# Altium PCB GPS_LEA5S.v.0.1.PcbDoc
Units mil, origin at the board's own origin, x right, y up, seen from the top; angles counter-clockwise.
Board outline 6000 x 4000 mil, 2 copper layers (Top Layer, Bottom Layer), stack 11.068 mil thick; 56 components, 12 nets, 83 pads, 254 vias.
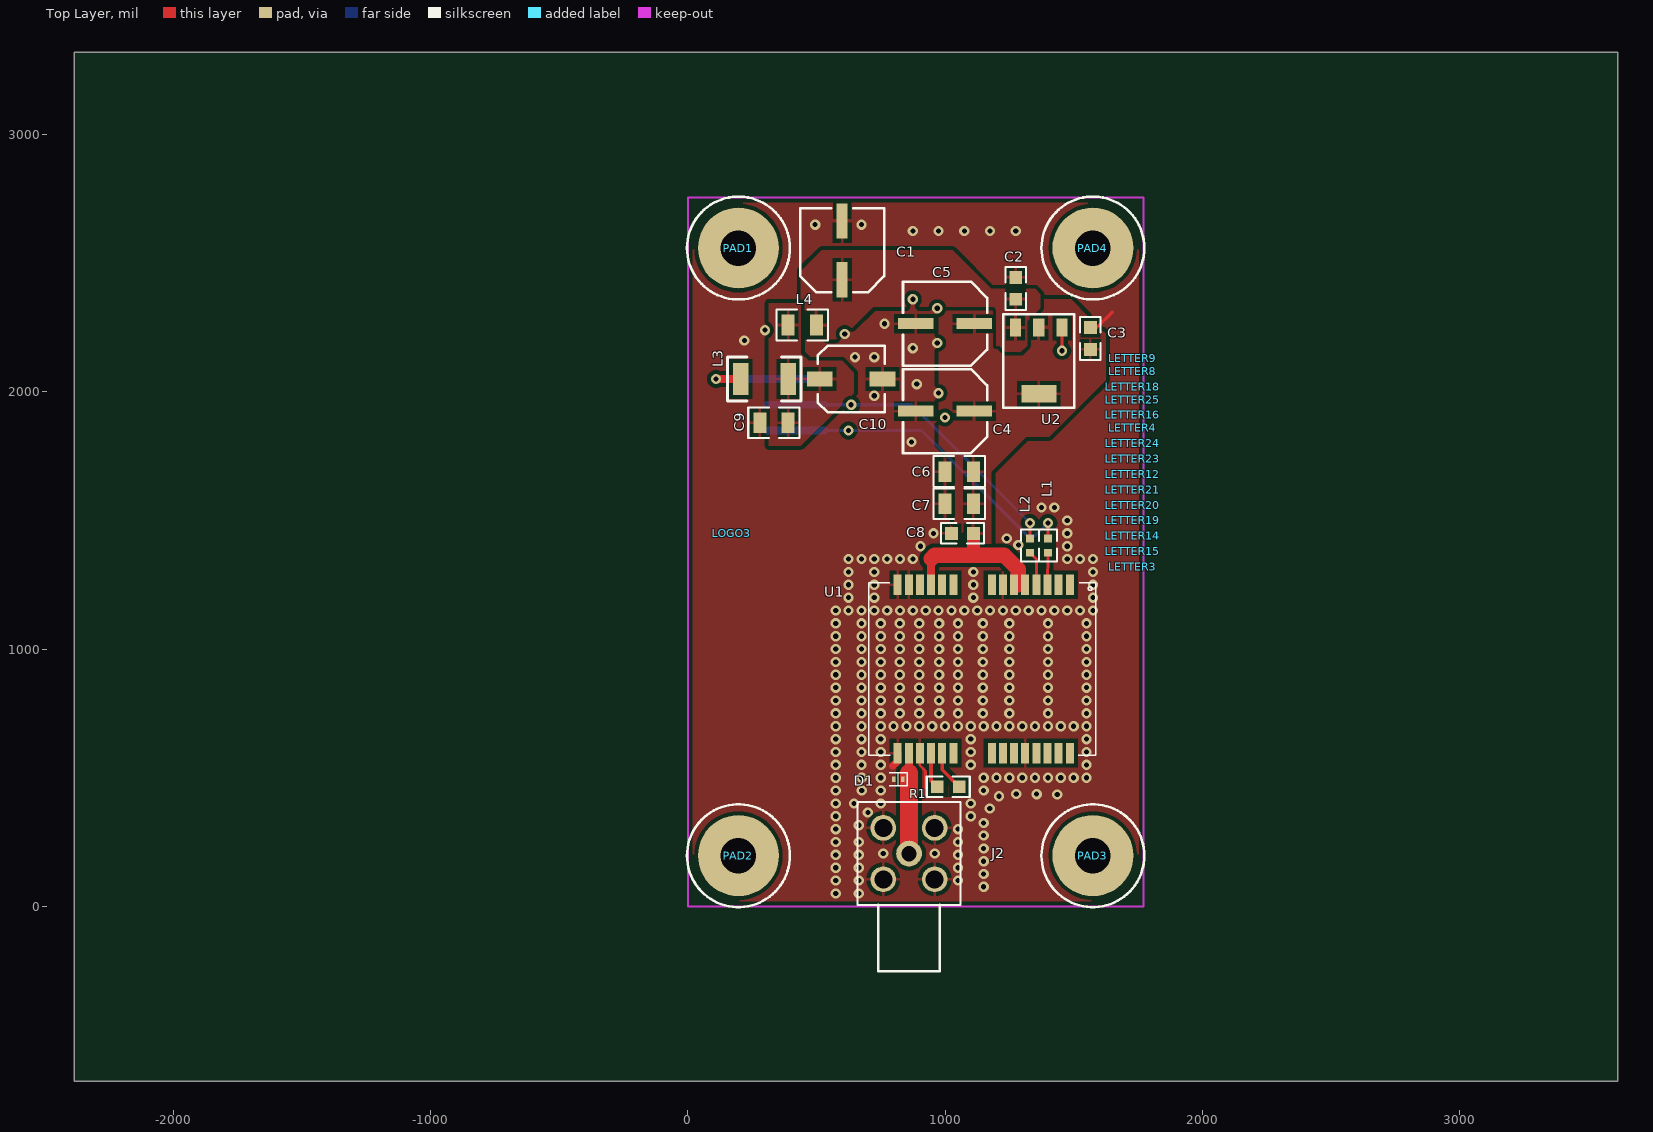
[diagram p0: Top Layer view]
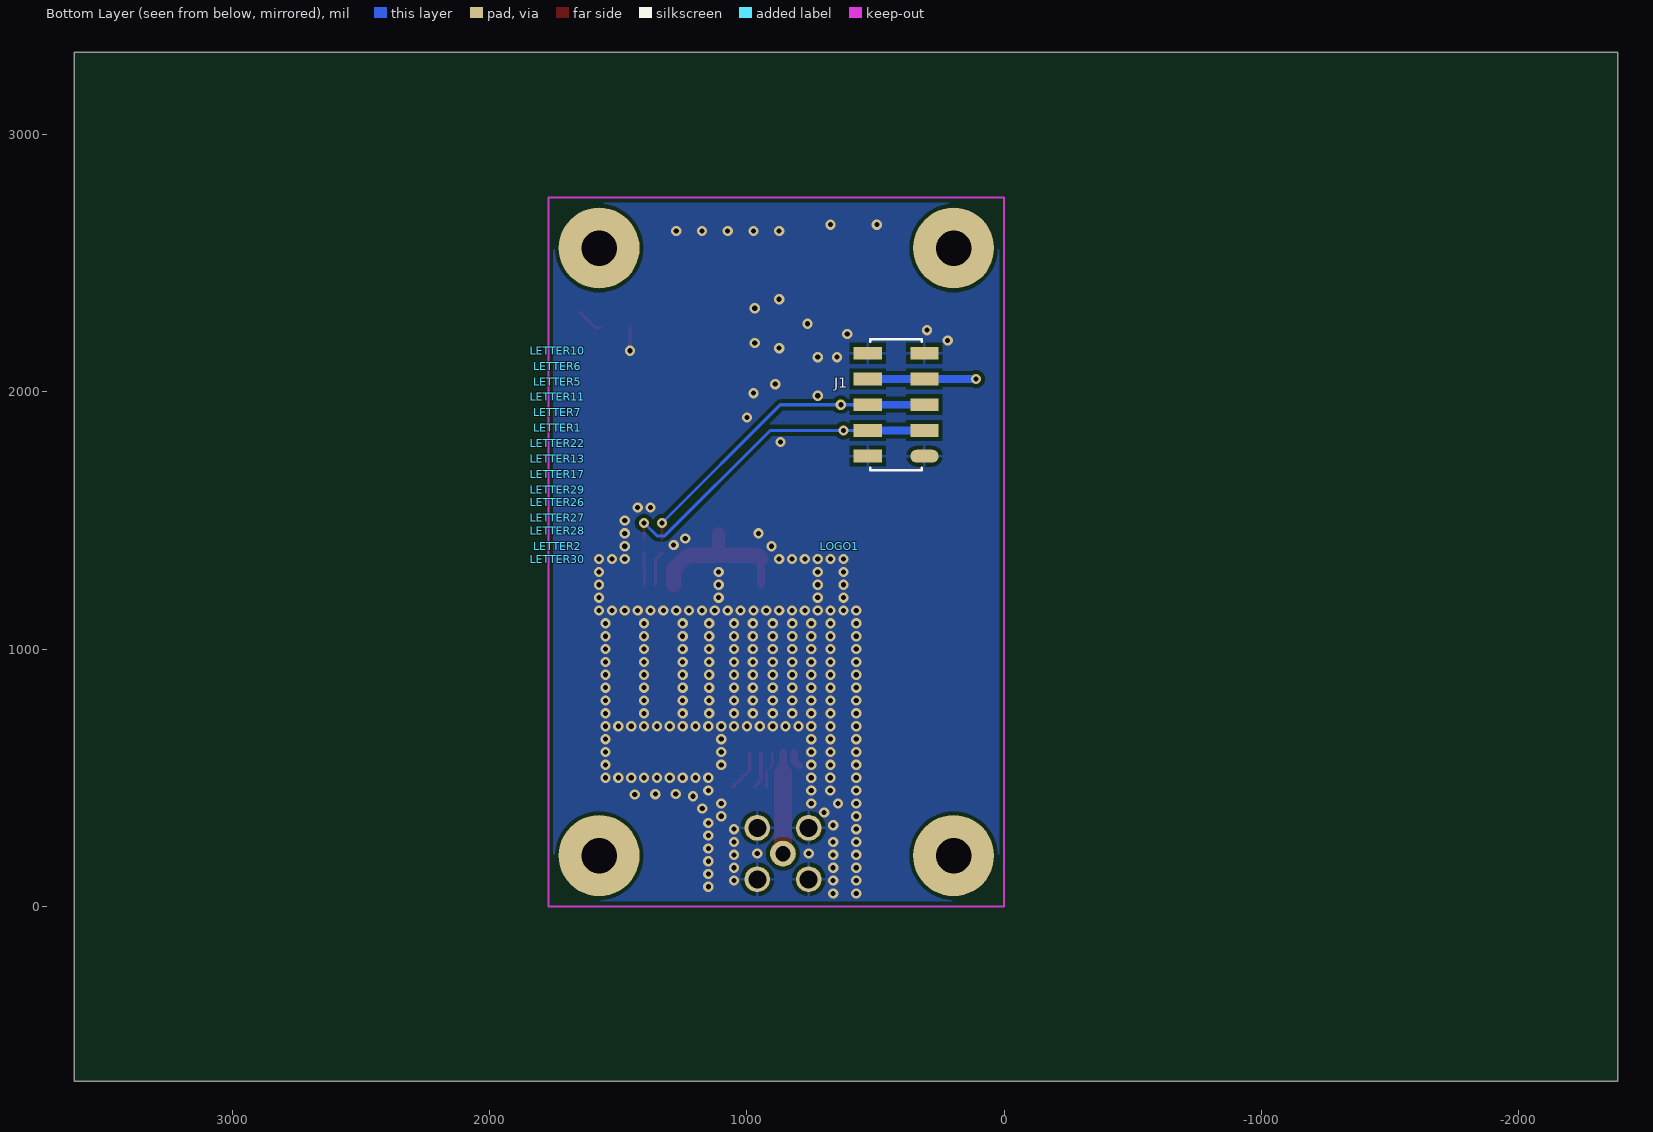
[diagram p1: Bottom Layer view, seen from below]

## Layer stack, top to bottom
Top Layer: signal copper 1.4
Dielectric: core 8.2677, FR-4, Dk 4.8
Bottom Layer: signal copper 1.4

## Board outline
-2385,-680 3615,-680 3615,3320 -2385,3320

## Design rules (kind name [scope] priority, off if disabled: settings)
Clearance Clearance_2 [InNet('NetJ2_1') And IsTrack and Width>60 vs InPoly] p1: gap=15.47
Clearance Clearance_1 [InPoly] p2: gap=15
Clearance [All] p3: gap=8
ComponentClearance [All] p1 off: gap=10 collisioncheckmode=3 verticalgap=10 showdistances=FALSE
FabricationTestPointUsage TestPointUsage [All] p1: valid=0 allowmultiple=FALSE
FabricationTestpoint Testpoint [All] p1: side=3 testpointundercomponent=TRUE minsize=40 maxsize=100 preferedsize=60 minholesize=0 maxholesize=40 preferedholesize=32 testpointgrid=1 allowsidetop=TRUE allowsidebottom=TRUE usegrid=TRUE gridtolerance=0.01
HoleSize [All] p1: absolutevalues=TRUE maxlimit=300 minlimit=1 maxpercent=80.000 minpercent=20.000
MinimumSolderMaskSliver [All] p1 off: minsoldermaskwidth=10
NetAntennae [All] p1 off: netantennaetolerance=0
PlaneConnect [All] p1: planeconnectstyle=Relief reliefexpansion=20 reliefentries=4 reliefconductorwidth=5 reliefairgap=10
PolygonConnect PolygonConnect_1 [IsVia] p1: connectstyle=Direct reliefconductorwidth=10 reliefentries=4 polygonreliefangle="90 Angle"
PolygonConnect [All] p2: connectstyle=Relief reliefconductorwidth=12 reliefentries=4 polygonreliefangle="90 Angle"
RoutingVias [All] p1: holewidth=50 width=100 viastyle="Through Hole" minholewidth=20 minwidth=40 maxholewidth=20 maxwidth=40
SilkToSilkClearance [All] p1: silktosilkclearance=4
SilkscreenOverComponentPads [All] p1: minsilkscreentomaskgap=6
SolderMaskExpansion [All] p1: expansion=4
Width [All] p1: maxlimit=200 minlimit=10 preferedwidth=12
19 further rules are at their usual default settings.

## Components (designator, comment, footprint, x,y, rotation, side; value= is the part's Value field where it differs from the comment)
C1 "220u/35V" CELE 600,2550 r180 top
C2 "100n/50V" 0805 1275,2360 r90 top
C3 "100n/50V" 0805 1565,2165 r90 top
C4 "220u/35V" CELE 1000,1925 r270 top
C5 "220u/35V" CELE 1000,2265 r270 top
C6 "10u/6.3V" 1206 1110,1690 r180 top
C7 "10u/6.3V" 1206 1110,1565 r180 top
C8 "100n/50V" 0805 1110,1450 r180 top
C9 "1u/50V" 1206 390,1880 r180 top
C10 "10u/50V" CE6.3x5.5 635,2050 r90 top
D1 "ESD9L5.0ST5G" SOD923 818,494 r0 top
J1 "PBTD10S" PBTD10S 420,1950 r90 bottom
J2 "SMA209L" SMA209L 860,205 r270 top
L1 "BLM18HD102SN1D" 0603 1400,1430 r270 top
L2 "BLM18HD102SN1D" 0603 1330,1430 r270 top
L3 "DLCF1812-101" 1812 205,2050 r0 top
L4 "BLM31P500SPT" 1206 390,2260 r0 top
LETTER1 "LETTER_E" LETTERC_E_60_10_TS 1735,1860 r270 bottom
LETTER2 "LETTER_DOT" LETTER_DOT_60_10_TS 1735,1400 r270 bottom
LETTER3 "LETTER_G" LETTERC_G_60_10_TS 1730,1320 r90 top
LETTER4 "LETTER_DOT" LETTER_DOT_60_10_TS 1730,1860 r90 top
LETTER5 "LETTER_S" LETTERC_S_60_10_TS 1735,2040 r270 bottom
LETTER6 "LETTER_P" LETTERC_P_60_10_TS 1735,2100 r270 bottom
LETTER7 "LETTER_P" LETTERC_L_60_10_TS 1735,1920 r270 bottom
LETTER8 "LETTER_DOT" LETTER_DOT_60_10_TS 1730,2080 r90 top
LETTER9 "LETTER_1" LETTER_1_60_10_TS 1730,2130 r90 top
LETTER10 "LETTER_G" LETTERC_G_60_10_TS 1735,2160 r270 bottom
LETTER11 "LETTER_UNDERSCORE" LETTER_UNDERSCORE_60_10_TS 1735,1980 r270 bottom
LETTER12 "LETTER_A_CAPITAL" LETTERC_A_60_10_TS 1730,1680 r90 top
LETTER13 "LETTER_5" LETTER_5_60_10_TS 1735,1740 r270 bottom
LETTER14 "LETTER_S" LETTERC_S_60_10_TS 1730,1440 r90 top
LETTER15 "LETTER_P" LETTERC_P_60_10_TS 1730,1380 r90 top
LETTER16 "LETTER_V" LETTER_V_60_10_TS 1730,1910 r90 top
LETTER17 "LETTER_S" LETTERC_S_60_10_TS 1735,1680 r270 bottom
LETTER18 "LETTER_0" LETTER_0_60_10_TS 1730,2020 r90 top
LETTER19 "LETTER_UNDERSCORE" LETTER_UNDERSCORE_60_10_TS 1730,1500 r90 top
LETTER20 "LETTER_P" LETTERC_L_60_10_TS 1730,1560 r90 top
LETTER21 "LETTER_E" LETTERC_E_60_10_TS 1730,1620 r90 top
LETTER22 "LETTER_A_CAPITAL" LETTERC_A_60_10_TS 1735,1800 r270 bottom
LETTER23 "LETTER_5" LETTER_5_60_10_TS 1730,1740 r90 top
LETTER24 "LETTER_S" LETTERC_S_60_10_TS 1730,1800 r90 top
LETTER25 "LETTER_DOT" LETTER_DOT_60_10_TS 1730,1970 r90 top
LETTER26 "LETTER_V" LETTER_V_60_10_TS 1735,1570 r270 bottom
LETTER27 "LETTER_DOT" LETTER_DOT_60_10_TS 1735,1510 r270 bottom
LETTER28 "LETTER_0" LETTER_0_60_10_TS 1735,1460 r270 bottom
LETTER29 "LETTER_DOT" LETTER_DOT_60_10_TS 1735,1620 r270 bottom
LETTER30 "LETTER_1" LETTER_1_60_10_TS 1735,1350 r270 bottom
LOGO1 "MRQLOGO" MRQ_5_TS 640,1400 r180 bottom
LOGO3 "MRQLOGO" MRQ_5_TS 170,1450 r0 top
PAD1 "PAD8x3.5" PAD8x3.5 196.85,2559.06 r0 top
PAD2 "PAD8x3.5" PAD8x3.5 196.85,196.85 r0 top
PAD3 "PAD8x3.5" PAD8x3.5 1574.8,196.85 r0 top
PAD4 "PAD8x3.5" PAD8x3.5 1574.8,2559.06 r0 top
R1 "10" 0805 1055,465 r180 top
U1 "LEA-5S" LEA-LA 1485,1250 r90 top
U2 "LM1117IMP-3.3/NOPB" SOT-223 1455,2250 r180 top

## Footprints (in the part's own frame and the unit in brackets; to place one, negate y for a bottom-side part, rotate by r counter-clockwise, add the part's x,y. Pads: shape width x height; smd on the part's side, far side on the other; paste and mask are expansions set on the pad)
0603 [mil]
  rect 30x30 smd: 1(0,0) 2(55,0)
  silkscreen extent -35,-35 90,35
0805 [mil]
  rect 50x50 smd: 1(0,0) 2(85,0)
  silkscreen extent -41,-40 126,40
1206 [mil]
  rect 50x80 smd: 1(0,0) 2(110,0)
  silkscreen extent -45,-60 155,60
1812 [mil]
  rect 60x125 smd: 1(0,0) 2(185,0)
  silkscreen extent -50,-85 235,85
CE6.3x5.5 [mil]
  rect 60x100 smd: 1(0,-122) 2(0,122)
  silkscreen extent -130,-130 130,130
CELE [mm]
  rect 1.1x3.5 smd: 1(0,-2.9) 2(0,2.9)
  silkscreen extent -4.15,-4.15 4.15,4.15
LEA-LA [mil]
  rect 80x31 smd mask+10: 1(0,0) 2(0,43.31) 3(0,86.61) 4(0,129.92) 5(0,173.23) 6(0,216.54) 7(0,259.84) 8(0,303.15) 9(0,452.76) 10(0,496.06) 11(0,539.37) 12(0,582.68) 13(0,625.98) 14(0,669.29) 15(-654.33,669.29) 16(-654.33,625.98) 17(-654.33,582.68) 18(-654.33,539.37) 19(-654.33,496.06) 20(-654.33,452.76) 21(-654.33,303.15) 22(-654.33,259.84) 23(-654.33,216.54) 24(-654.33,173.23) 25(-654.33,129.92) 26(-654.33,86.61) 27(-654.33,43.31) 28(-654.33,0)
  silkscreen extent -662,-100 7,781
LETTER_0_60_10_TS [mil]
LETTER_1_60_10_TS [mil]
LETTER_5_60_10_TS [mil]
LETTER_DOT_60_10_TS [mil]
LETTER_UNDERSCORE_60_10_TS [mil]
LETTER_V_60_10_TS [mil]
LETTERC_A_60_10_TS [mil]
LETTERC_E_60_10_TS [mil]
LETTERC_G_60_10_TS [mil]
LETTERC_L_60_10_TS [mil]
LETTERC_P_60_10_TS [mil]
LETTERC_S_60_10_TS [mil]
MRQ_5_TS [mil]
PAD8x3.5 [mm]
  round 8 hole 3.5: 1(0,0)
  silkscreen extent -5.08,-5.08 5.08,5.08
PBTD10S [mil]
  oval 50x110 smd: 1(-200,-110)
  rect 50x110 smd: 2(-200,110) 3(-100,-110) 4(-100,110) 5(0,-110) 6(0,110) 7(100,-110) 8(100,110) 9(200,-110) 10(200,110)
  silkscreen extent -255,-100 255,100
SMA209L [mil]
  round 100 hole 60: 1(0,0)
  round 100 hole 70: 2(100,100) 3(-100,100) 4(-100,-100) 5(100,-100)
  silkscreen extent -200,-200 457,200
SOD923 [mm]
  rect 0.35x0.5 smd: ANOD(-0.425,0) CATH(0.425,0)
  silkscreen extent -0.89,-0.64 0.89,0.64
SOT-223 [mm]
  rect 1.1x1.75 smd: 1(0,0) 2(2.3,0) 3(4.6,0)
  rect 3.45x1.75 smd: 4(2.3,6.55)
  silkscreen extent -1.2,-1.3 5.8,7.9

## Part data
C1 C4 C5: library part 220u/35V[[/\]]CELE[[/\]]35V[[/\]]20%[[/\]]VRF227M1VFT2TRS1
C2 C3 C8: library part 100n/50V[[/\]]0805[[/\]]50V[[/\]]10%[[/\]]CL21B104KBCNNNC
C6 C7: library part 10u/6.3V[[/\]]1206[[/\]]6.3V[[/\]]10%[[/\]]CL31B106KQHNNNE
C9: library part 1u/50V[[/\]]1206[[/\]]50V[[/\]]10%[[/\]]C1206C105K5RAC
C10: library part 10u/50V[[/\]]CE6.3x5.5[[/\]]50V[[/\]]20%[[/\]]CE10/50-SMD
D1: library part ESD9L5.0ST5G[[/\]]SOD923
J1: library part PBTD10S[[/\]]PBTD10S, "Connector"
J2: library part SMA209L[[/\]]SMA209L
L1 L2: library part BLM18HD102SN1D[[/\]]0603
L3: library part DLCF1812-101[[/\]]1812
L4: library part BLM31P500SPT[[/\]]1206
LETTER7 LETTER20: library part LETTER_L
LETTER12 LETTER22: library part LETTER_A
R1: library part "10[[/\]]0805[[/\]]0.125W[[/\]]5%[[/\]]0805WAJ 10R T5E"
U1: library part LEA-5S[[/\]]LEA-LA
U2: library part LM1117IMP-3.3/NOPB[[/\]]SOT-223

## Via types
v1: diameter 40, hole 20, Top Layer to Bottom Layer, tented both sides, 254 vias

## Nets (pads, with @x,y where several pads share a name; then routed paths per layer and width w, separated by ;. In a path a pad name is that pad's centre, name@x,y a point inside that pad or via, vN(x,y) a via of type N, cw(c..) or ccw(c..) an arc to the next point about the centre after c; other vN are vias at no path point)
+12V: J1.7 J1.8 L3.1 | length 515
  Top Layer w30: v1(110,2050) L3.1
  Bottom Layer w30: v1(110,2050) J1.7 J1.8
GND: C1.1 C2.2 C3.2 C4.1 C5.1 C6.2 C7.2 C8.2 C9.2 C10.1 D1.ANOD J1.1 J1.2 J1.9 J1.10 J2.2 J2.3 J2.4 J2.5 U1.7 U1.13 U1.14 U1.15 U1.17 U1.24 U2.1 | length 398.9
  Top Layer w10: U1.17 902.32,547.58 924,525.9 924,463
  Top Layer w12: v1(1455,2160) U2.1 ; C3.2 1590,2250 1650,2310
  Top Layer w30: 797,546 815.71,564.71 U1.15
  other v1: 575,50 665,50 1150,76 575,100 665,100 1050,100 1150,126 575,150 665,150 1050,150 1150,175 575,200 665,200 1050,200 760,205 960,205 1150,225 575,250 665,250 1050,250 1150,275 575,300 1050,300 665,315 1150,324 575,350 1100,350 700,365 1174,380 575,400 646,400 750,400 1100,400 1210,428 1436,435 1356,436 1277,437 575,450 676,450 750,450 1150,450 575,500 676,500 750,500 1150,500 1200,500 1250,500 1300,500 1350,500 1400,500 1450,500 1500,500 1550,500 575,550 675,550 750,550 1100,550 1550,550 575,600 675,600 750,600 1100,600 1550,600 575,650 675,650 750,650 1100,650 1550,650 575,700 675,700 750,700 800,700 850,700 900,700 950,700 1000,700 1050,700 1100,700 1150,700 1200,700 1250,700 1300,700 1350,700 1400,700 1450,700 1500,700 1550,700 575,750 675,750 750,750 824,750 900,750 977,750 1050,750 1147,750 1250,750 1400,750 1550,750 575,800 675,800 750,800 824,800 900,800 977,800 1050,800 1147,800 1250,800 1400,800 1550,800 575,850 675,850 750,850 824,850 900,850 977,850 1050,850 1147,850 1250,850 1400,850 1550,850 575,900 675,900 750,900 824,900 900,900 977,900 1050,900 1147,900 1250,900 1400,900 1550,900 575,950 675,950 750,950 824,950 900,950 977,950 1050,950 1147,950 1250,950 1400,950 1550,950 575,1000 675,1000 750,1000 824,1000 900,1000 977,1000 1050,1000 1147,1000 1250,1000 1400,1000 1550,1000 575,1050 675,1050 750,1050 824,1050 900,1050 977,1050 1050,1050 1147,1050 1250,1050 1400,1050 1550,1050 575,1100 675,1100 750,1100 824,1100 900,1100 977,1100 1050,1100 1147,1100 1250,1100 1400,1100 1550,1100 575,1150 625,1150 675,1150 725,1150 775,1150 825,1150 875,1150 925,1150 975,1150 1025,1150 1075,1150 1125,1150 1175,1150 1225,1150 1275,1150 1325,1150 1375,1150 1425,1150 1475,1150 1525,1150 1575,1150 625,1200 725,1200 1110,1200 1575,1200 625,1250 725,1250 1110,1250 1575,1250 625,1300 725,1300 1110,1300 1575,1300 625,1350 675,1350 725,1350 775,1350 825,1350 875,1350 1475,1350 1525,1350 1575,1350 905,1400 1475,1400 1285,1405 1240,1430 955,1450 1475,1450 1475,1500 1375,1550 1425,1550 870,1805 1000,1900 725,1985 975,1995 890,2030 650,2135 725,2135 875,2170 970,2190 220,2200 610,2225 300,2240 765,2265 970,2325 875,2360 875,2625 975,2625 1075,2625 1175,2625 1275,2625 495,2650 675,2650
NetC1_2: C1.2 C2.1 L4.2 U2.3
NetC3_1: C3.1 C4.2 C5.2 C6.1 C7.1 C8.1 U1.5 U1.6 U1.11 U2.2 U2.4 | length 613.7
  Top Layer w30: U1.11 945.63,1350.63
  Top Layer w50: 1110,1365 C8.1
  Top Layer w60: 945.63,1350.63 960,1365 1110,1365 1230,1365 1285,1310 1285,1250
NetC9_1: C9.1 C10.2 L3.2 L4.1
NetD1_CATH: D1.CATH J2.1 U1.16 | length 377.4
  Top Layer w30.71: U1.16 859.8,531.3
  Top Layer w69.06: J2.1 860,518
NetJ1_3: J1.3 J1.4 L1.1 | length 1340.5
  Top Layer w12: L1.1 v1(1400,1490)
  Bottom Layer w12: J1.4 v1(625,1850) 910,1850 1320,1440 1350,1440 v1(1400,1490)
  Bottom Layer w30: J1.3 J1.4
NetJ1_5: J1.5 J1.6 L2.1 | length 1270.5
  Top Layer w12: L2.1 v1(1330,1490)
  Bottom Layer w12: J1.6 v1(635,1950) 870,1950 v1(1330,1490)
  Bottom Layer w30: J1.5 J1.6
NetL1_2: L1.2 U1.3 | length 125
  Top Layer w12: U1.3 L1.2
NetL2_2: L2.2 U1.4 | length 135.4
  Top Layer w12: L2.2 1355.08,1349.92 U1.4
NetR1_1: R1.1 U1.19 | length 158
  Top Layer w15: U1.19 988.94,531.06 R1.1
NetR1_2: R1.2 U1.18 | length 140.8
  Top Layer w15: U1.18 945.63,489.37 R1.2
pads on no net: PAD1.1 PAD2.1 PAD3.1 PAD4.1 U1.1 U1.2 U1.8 U1.9 U1.10 U1.12 U1.20 U1.21 U1.22 U1.23 U1.25 U1.26 U1.27 U1.28

## Polygon pours and split planes (outlines as drawn)
GND on Top Layer "GNDOnTop" (solid, remove dead copper, pour order 1006): 1771.65,0 1771.65,2754.09 1769.84,2755.91 0,2755.91 0,0
NetC9_1 on Top Layer "NetC9_1OnTop" (solid, remove dead copper, pour order 1003): 315,2345 440,2345 440,2150 470,2120 600,2120 645,2075 645,1995 440,1790 315,1790
NetC1_2 on Top Layer "NetC1_2OnTop" (solid, remove dead copper, pour order 1004): 440,2205 440,2470 445,2475 520,2550 575,2550 1030,2550 1045,2535 1180,2400 1260,2400 1350,2400 1370,2380 1370,2365 1370,2325 1320,2275 1320,2255 1320,2180 1295,2155 1285,2155 1235,2155 1230,2160 1210,2180 1200,2180 1200,2320 1190,2330 1150,2330 720,2330 715,2325 595,2205 540,2205
NetC3_1 on Top Layer "NetC3_1OnTop" (solid, remove dead copper, pour order 1005): 1035,1395 1035,1735 975,1795 975,2320 1015,2360 1490,2360 1625,2225 1625,2120 1625,2045 1540,1960 1405,1825 1315,1825 1180,1690 1180,1395
GND on Bottom Layer "GNDOnBottom" (solid, remove dead copper, pour order 1000): 0,2755.91 0.91,2755 1770.75,2755 1770.75,0.91 1771.65,0 0,0

## Keep-outs
Keep-Out Layer:
  lines w8: 1770.75,2755 0,2755 0,0 1771.65,0 1771.65,2755.91

## Silkscreen, mask and mechanical layers (free items; w line width, h text height)
Mechanical 1:
  lines w10: 0,0 0,2755.91 1771.65,2755.91 1771.65,0 0,0